# EAGLE board card (EAGLE 8.3.1)
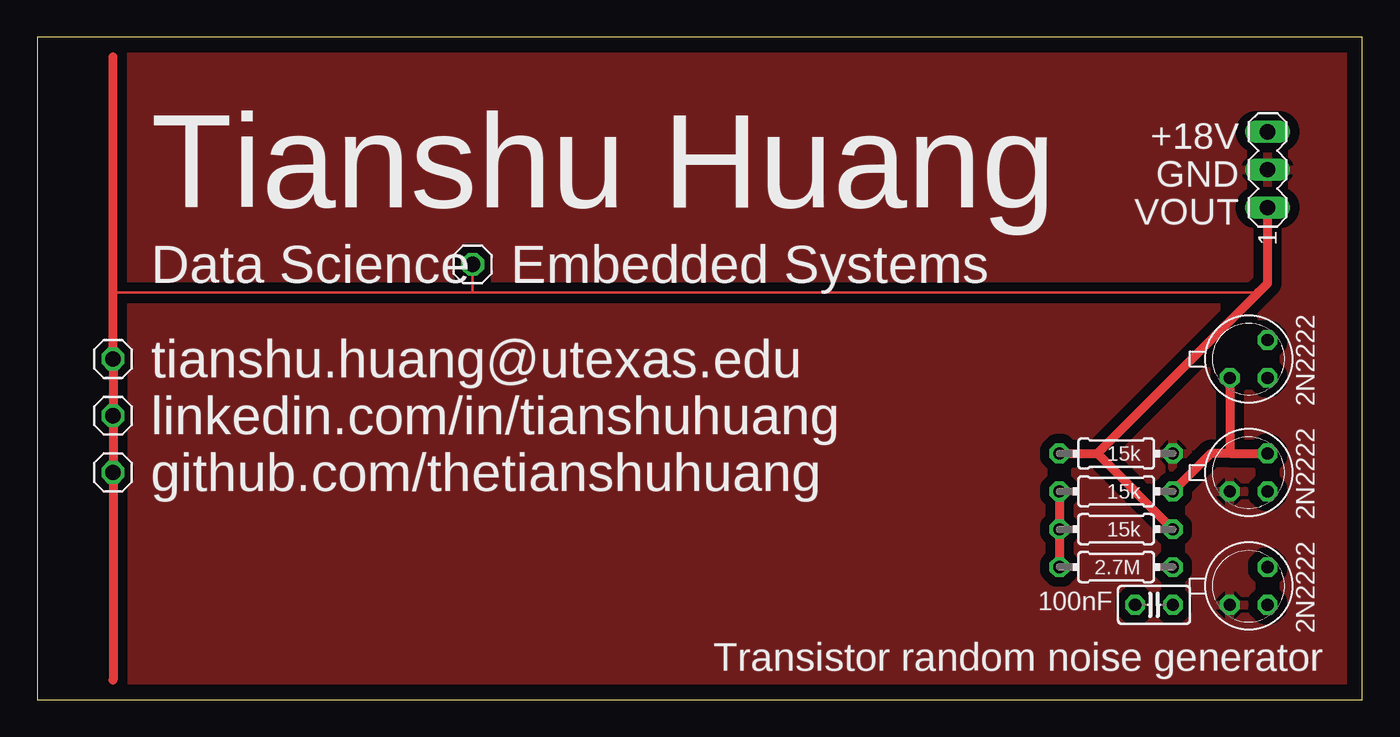
[diagram p0: board, top side]
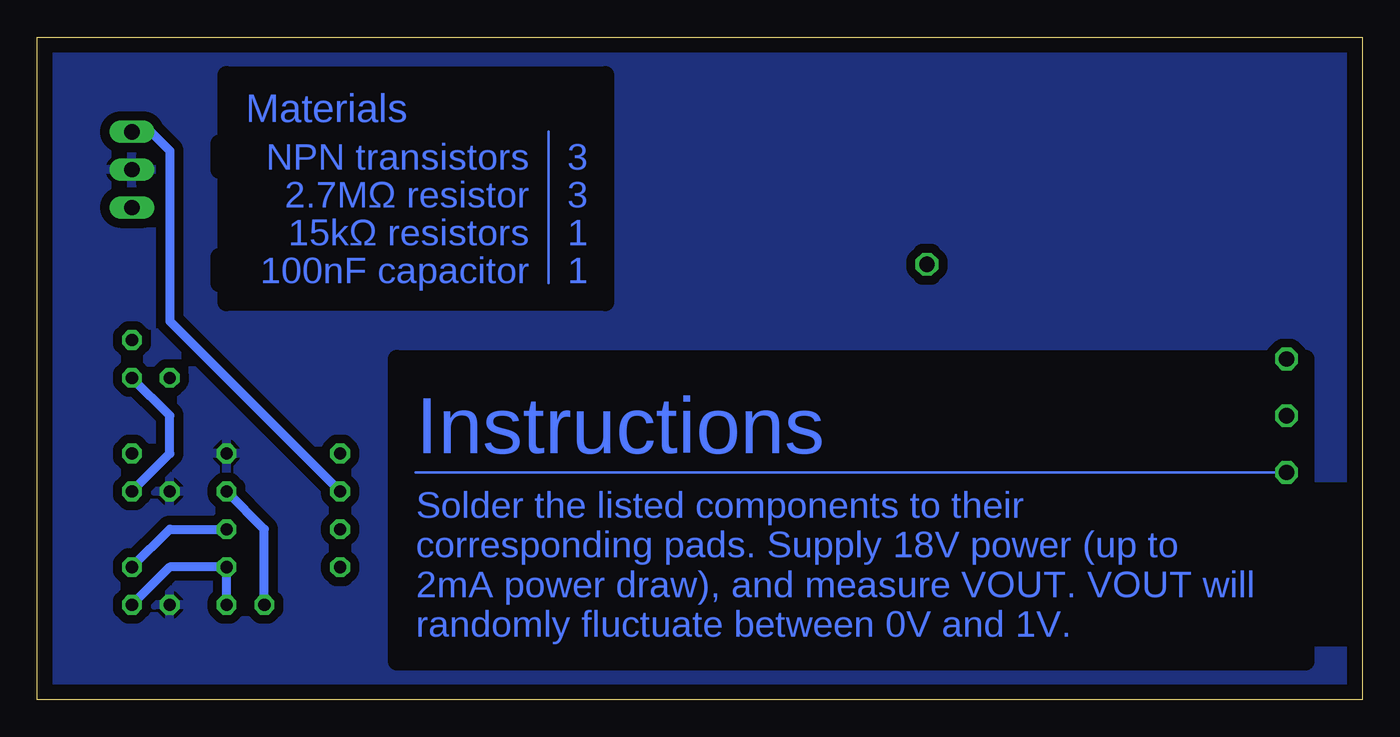
[diagram p1: board, bottom side, seen from below]

Size 88.9 x 44.45 mm. Coordinates in mm from the lower left corner, seen from the top.
Outline: 0,0 88.9,0 88.9,44.45 0,44.45 0,0
Copper layers (1*16): Top 0.035mm / dielectric 1.5mm / Bottom 0.035mm
Design rules "default": minimum track width 6mil, minimum drill 0.35mm, track to track 6mil, track to pad 6mil, pad to pad 6mil, via to via 6mil, smd to smd 6mil, copper to edge 40mil, drill to drill 6mil, minimum pad ring 10mil, minimum via ring 8mil, stop-mask expansion 4mil, vias tented up to drill 0mil, thermal gap 10mil
bRestrict: area 50.8,26.7 to 76.2,41.9; area 3.8,2.5 to 64.8,22.9

## Footprints (pad centres in the part's own frame; a part is rotated, then mirrored left to right if it is on the bottom)
C025-025X050 = drill 0.813 octagon: 1 -1.27,0; 2 1.27,0
1X01 = drill 1.016 octagon: 1 0,0
0204/7 = drill 0.813 octagon: 1 -3.81,0; 2 3.81,0
MA03-1 = drill 1.016 long: 1 -2.54,0; 2 0,0; 3 2.54,0
TO18 = drill 0.813 octagon: 1 -1.27,-1.27; 2 1.27,-1.27; 3 1.27,1.27

## Placement (x,y rotation side)
C1  100nF  [C025-025X050]  74.93,6.35 0 top
JP1  [1X01]  5.08,22.86 0 top
JP2  [1X01]  5.08,19.05 0 top
JP3  [1X01]  5.08,15.24 0 top
JP4  [1X01]  29.21,29.21 0 top
R1  15k  [0204/7]  72.39,13.97 180 top
R2  2.7M  [0204/7]  72.39,8.89 180 top
R3  15k  [0204/7]  72.39,11.43 180 top
R4  15k  [0204/7]  72.39,16.51 180 top
SV1  [MA03-1]  82.55,35.56 90 top
T1  2N2222  [TO18]  81.28,15.24 0 top
T2  2N2222  [TO18]  81.28,22.86 0 top
T3  2N2222  [TO18]  81.28,7.62 0 top

## Library data of the parts
C1 = rcl
JP1-JP4 = pinhead
R1-R4 = resistor
SV1 = con-lstb; OC_FARNELL: unknown; OC_NEWARK: unknown
T1-T3 = transistor

## Nets
GND: R4.1 SV1.2 T1.1 T3.1
N$1: T1.2 T2.2
N$2: C1.1 R1.1 T1.3 T2.1
N$3: C1.2 R2.1 T3.2
VCC: R1.2 R2.2 R3.2 SV1.3
VOUT: JP1.1 JP2.1 JP3.1 JP4.1 R3.1 R4.2 SV1.1 T3.3

## Tracks (layer width: path | path; a pad name or v marks a point on that pad's centre or on a via)
GND
  pour Top (isolate 0.635): 0,44.45 0,0 88.9,0 88.9,44.45
  pour Bottom (isolate 0.61): 0,44.45 0,0 88.9,0 88.9,44.45
N$1
  Bottom 0.61: T1.2 80.01,16.51 80.01,19.05 T2.2
N$2
  Top 0.61: R1.1 78.74,16.51 80.14,16.51 | 80.14,16.51 T1.3 | T2.1 80.01,16.64 80.14,16.51
  Bottom 0.61: C1.1 73.66,11.43 R1.1
N$3
  Bottom 0.61: T3.2 80.01,8.89 R2.1 C1.2
N$4
  Bottom 0.152: 54.61,27.94 54.61,38.1
VCC
  Top 0.61: R1.2 R3.2 R2.2
  Bottom 0.61: SV1.3 81.28,38.1 80.01,36.83 80.01,25.4 R1.2
VOUT
  Top 0.152: 5.08,27.3 29.21,27.3 | 29.21,27.3 JP4.1 | 29.21,27.3 81.92,27.3 81.93,27.32
  Top 0.61: R4.2 71.12,16.51 | 71.12,16.51 R3.1 | 71.12,16.51 81.93,27.32 82.55,27.94 SV1.1 | 5.08,1.32 JP3.1 JP2.1 JP1.1 5.08,27.3 5.08,43.13
  Bottom 0.152: 63.5,15.24 JP3.1
  Bottom 0.61: T3.3 80.01,11.43 R3.1

## Text on the board
Bottom: Materials | 3 | NPN transistors | 3 | 2.7MΩ resistor | 1 | 15kΩ resistors | 1 | 100nF capacitor | Instructions | Solder the listed components to their / corresponding pads. Supply 18V power (up to / 2mA power draw), and measure VOUT. VOUT will / randomly fluctuate between 0V and 1V.
tPlace: +18V | GND | VOUT | Tianshu Huang | Data Science | Embedded Systems | tianshu.huang@utexas.edu | linkedin.com/in/tianshuhuang | github.com/thetianshuhuang | Transistor random noise generator